# Altium PCB PCB1.PcbDoc
Units mm, origin at the board's own origin, x right, y up, seen from the top; angles counter-clockwise.
Board outline 20 x 20 mm, 2 copper layers (Top Layer, Bottom Layer), stack 1.671 mm thick; 5 components, 4 nets, 10 pads, 1 vias.
Unrouted connection lines stored in the file: 1.
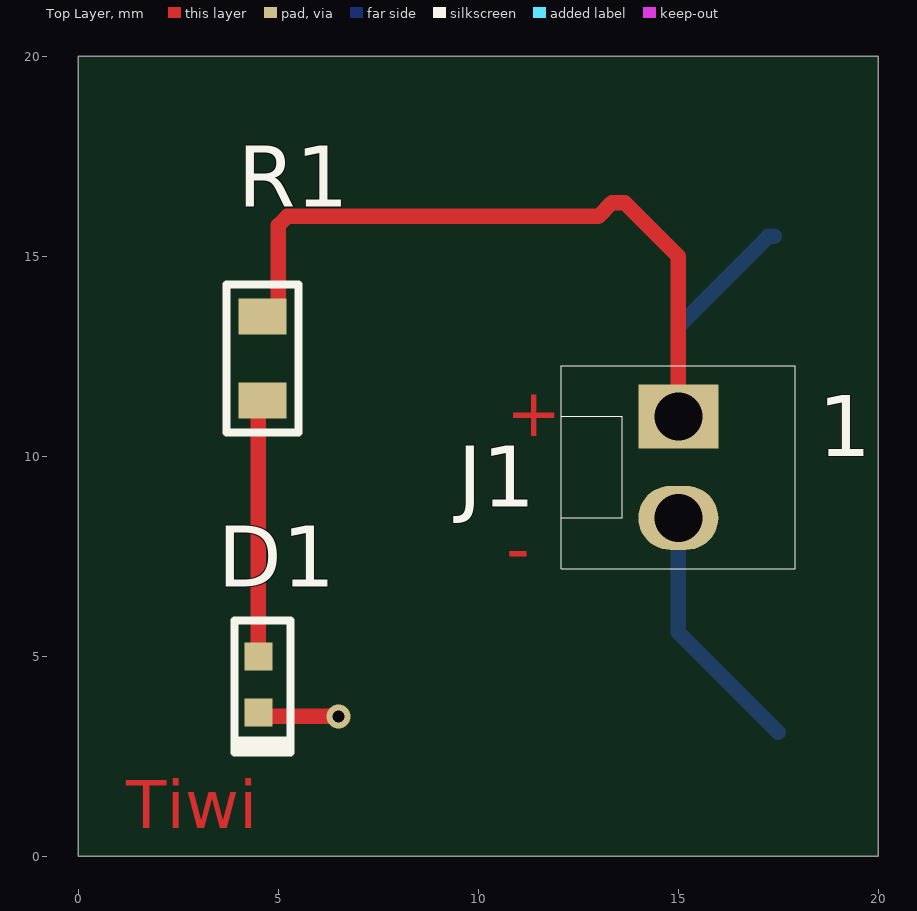
[diagram p0: Top Layer view]
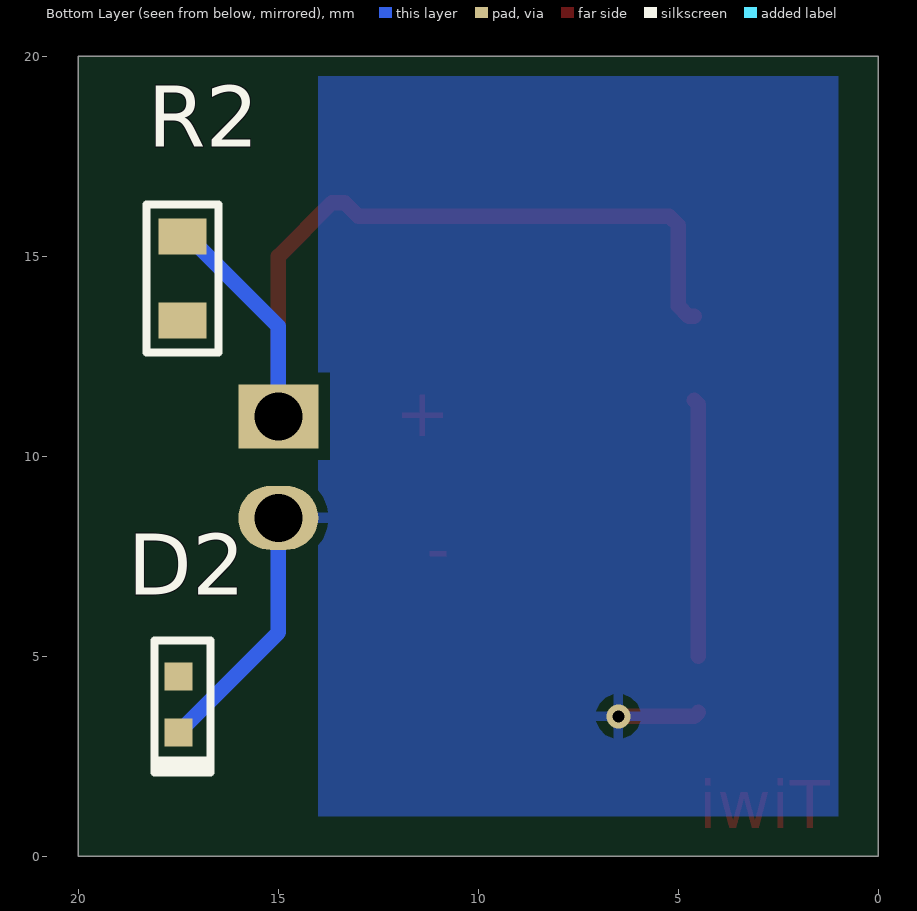
[diagram p1: Bottom Layer view, seen from below]

## Layer stack, top to bottom
Top Solder: solder mask 0.0102, Solder Resist, Dk 3.5
Top Layer: signal copper 0.0356
Dielectric 1: dielectric 1.6, FR-4, Dk 4.8
Bottom Layer: signal copper 0.0356
Bottom Solder: solder mask 0.0102, Solder Resist, Dk 3.5

## Board outline
0,0 20,0 20,20 0,20

## Design rules (kind name [scope] priority, off if disabled: settings)
Clearance [All] p1: gap=0.3 ignorepadtopadclearanceinfootprint=FALSE
PolygonConnect [All] p1: connectstyle=Relief reliefconductorwidth=0.254 reliefentries=4 polygonreliefangle="90 Angle" airgapwidth=0.254
RoutingVias [All] p1: holewidth=0.3 width=0.6 viastyle="Through Hole" minholewidth=0.3 minwidth=0.6 maxholewidth=0.3 maxwidth=0.6
SilkToSolderMaskClearance [IsPad] p1: minsilkscreentomaskgap=0.1 clearancetoexposedcopper=TRUE
SolderMaskExpansion [All] p1: expansion=0.102 istentingtop=FALSE
SupplyNets "Schematic Supply Nets_1" [InNet('GND')] p1: voltage=0.000
SupplyNets "Schematic Supply Nets" [InNet('+3V3')] p2: voltage=0.000
Width [All] p1: maxlimit=1 minlimit=0.3 preferedwidth=0.5
29 further rules are at their usual default settings.

## Components (designator, comment, footprint, x,y, rotation, side; value= is the part's Value field where it differs from the comment)
D1 "GREEn" LEd0603G 4.5,4.3 r90 top
D2 "GREEn" LEd0603G 17.5,3.8 r90 bottom
J1 "1x2Header" HDR1x2 15,11 r0 top
R1 "360R" R0805 4.5,12.5 r90 top
R2 "360R" R0805 17.5,14.5 r90 bottom

## Footprints (in the part's own frame and the unit in brackets; to place one, negate y for a bottom-side part, rotate by r counter-clockwise, add the part's x,y. Pads: shape width x height; smd on the part's side, far side on the other; paste and mask are expansions set on the pad)
HDR1x2 [mm]
  rect 2x1.6 hole 1.2: 1(0,0)
  oval 2x1.6 hole 1.2: 2(0,-2.54)
  silkscreen extent -2.92,-3.81 2.92,1.27, body extent -2.9,-3.81 2.9,1.27, height 11.71
LEd0603G [mm]
  rect 0.7x0.7 smd: 1(-0.7,0) 2(0.7,0)
  silkscreen extent -1.7,-0.8 1.6,0.6, body extent -0.8,-0.4 0.8,0.4, height 0.59
R0805 [mm]
  rect 0.9x1.2 smd: 1(-1.1,-0.1) 2(1,-0.1)
  silkscreen extent -1.9,-1 1.8,0.8, body extent -1.1,-0.72 0.9,0.53, height 0.61

## Part data
D1 D2: library part LSM0603453V, "LED GREEN CLEAR CHIP 0603 SMD", Manufacturer="Visual Communications", Supplier Part Number=LSM0603453VCT-ND, Category=LEDs, ComponentLink1Description=https://datasheet.ciiva.com:443/pdfs/VipMasterIC/IC/VISU/VISU-S-A0009188582/VISU-S-A0009188582-1.pdf?src-supplier=IHS+Markit, ComponentLink1URL=https://datasheet.ciiva.com:443/pdfs/VipMasterIC/IC/VISU/VISU-S-A0009188582/VISU-S-A0009188582-1.pdf?src-supplier=IHS+Markit, ComponentLink2Description=http://www.farnell.com/datasheets/2699708.pdf?src-supplier=Farnell, ComponentLink2URL=http://www.farnell.com/datasheets/2699708.pdf?src-supplier=Farnell, ComponentLink3Description=http://www.farnell.com/datasheets/2699708.pdf?src-supplier=Newark, ComponentLink3URL=http://www.farnell.com/datasheets/2699708.pdf?src-supplier=Newark, ComponentLink4Description=https://vcclite.com/wp-content/uploads/wpallimport/files/files/LSM0603453V.pdf?src-supplier=Digikey, ComponentLink4URL=https://vcclite.com/wp-content/uploads/wpallimport/files/files/LSM0603453V.pdf?src-supplier=Digikey, Manufacturer Part Number=LSM0603453V, Optoelectronic Device Type="SINGLE COLOR LED", Pricing="1=0.5, 10=0.291, 100=0.1218, 500=0.1086, 1000=0.1071 (USD)", Reach SVHC Compliant=Yes, RoHS=Yes, RoHS Compliant=Yes, Stock=27358, Supplier=Digikey
J1: library part "22-27-2021 (3)", "CONN HEADER VERT 2POS 2.54MMT", Contact Resistance=10mR, Flammability Rating="UL94 V-0", Insulation Color=White, Insulation Resistance=1GR, Manufacturer=Molex, Manufacturer Part Number=22-27-2021, Max Operating Temperature=75°C, Min Operating Temperature=0°C, Rated Current (Signal)=4A, Supplier Part Number=WM4111-ND, Body Breadth=0.23inch, Body Depth=0.46inch, Body Length=0.2inch, Body/Shell Style=RECEPTACLE, Category="Headers and Wire Housings", ComponentLink1Description=https://datasheet.ciiva.com:443/pdfs/VipMasterIC/IC/MOLE/MOLE-E-A0003552261/MOLE-S-A0003534498-1.pdf?src-supplier=IHS+Markit, ComponentLink1URL=https://datasheet.ciiva.com:443/pdfs/VipMasterIC/IC/MOLE/MOLE-E-A0003552261/MOLE-S-A0003534498-1.pdf?src-supplier=IHS+Markit, ComponentLink2Description=https://datasheet.ciiva.com/15217/getdatasheetpartid-163454-15217683.pdf?src-supplier=Verical, ComponentLink2URL=https://datasheet.ciiva.com/15217/getdatasheetpartid-163454-15217683.pdf?src-supplier=Verical, ComponentLink3Description=https://datasheet.ciiva.com/9468/0022272021-pcb-headers-9468403.pdf?src-supplier=Avnet, ComponentLink3URL=https://datasheet.ciiva.com/9468/0022272021-pcb-headers-9468403.pdf?src-supplier=Avnet, Connector Type="BOARD CONNECTOR", Contact Finish - Mating="NOT SPECIFIED", Contact Finish - Termination="Bright Tin (Sn)", Contact Gender=Male, Contact Material=Brass, Contact Pattern=RECTANGULAR, Contact Style="SQ PIN-SKT", DIN Conformance=No, Durability=25Cycles, Filter Feature=No, IEC Conformance=No, Insulation Material=Nylon, JESD-609 Code=e3, Mating Contact Pitch=0.1inch, Mating Information="MULTIPLE MATING PARTS AVAILABLE", MIL Conformance=No, Mixed Contacts=No, Mounting Option 1=LOCKING, Mounting Style=STRAIGHT, Mounting Technology=Board, Number Of Connectors=1, Number of Contacts=2, Number Of PCB Rows=1, Number of Rows Loaded=1, Option="General Purpose", PCB Contact Pattern=RECTANGULAR, Plating Thickness=100uin, Polarization Key="POLARIZED HOUSING", Pricing="1=0.24, 10=0.208, 100=0.1766, 500=0.15764, 2850=0.1394, 5700=0.13275, 11400=0.12641 (USD)", Reach SVHC Compliant=Yes, Reference Standard=UL, Reliability=COMMERCIAL, RoHS=Yes, RoHS Compliant=Yes, Stock=49685, Supplier=Digikey, Terminal Length=0.14inch, Terminal Pitch=2.54mm, Termination=Solder
R1 R2: library part AC0805FR-07360RL, "RES SMD 360 OHM 1% 1/8W 0805", Case/Package=0805, Manufacturer=Yageo, Max Operating Temperature=155°C, Min Operating Temperature=-55°C, Package Height=0.5mm, Package Length=2mm, Package Shape=Rectangular, Package Width=1.25mm, Power=125mW, Rated Temperature=70°C, Resistor Type="FIXED RESISTOR", Supplier Part Number=6185724, Temperature Coefficient (ppm/Cel)=100, Tolerance=1%, Working Voltage=150V, Additional Feature="LASER TRIMMABLE", Category="Chip SMD Resistors", ComponentLink1Description=https://datasheet.ciiva.com:443/pdfs/VipMasterIC/IC/YAGO/YAGO-S-A0003597364/YAGO-S-A0003597364-1.pdf?src-supplier=IHS+Markit, ComponentLink1URL=https://datasheet.ciiva.com:443/pdfs/VipMasterIC/IC/YAGO/YAGO-S-A0003597364/YAGO-S-A0003597364-1.pdf?src-supplier=IHS+Markit, ComponentLink2Description=http://www.yageo.com/NewPortal/yageodocoutput?fileName=/pdf/R-Chip/PYu-AC_51_RoHS_L_6.pdf&src-supplier=Digikey, ComponentLink2URL=http://www.yageo.com/NewPortal/yageodocoutput?fileName=/pdf/R-Chip/PYu-AC_51_RoHS_L_6.pdf&src-supplier=Digikey, ComponentLink3Description=https://datasheet.octopart.com/AC0805FR-07360RL-Yageo-datasheet-178509465.pdf?src-supplier=Newark, ComponentLink3URL=https://datasheet.octopart.com/AC0805FR-07360RL-Yageo-datasheet-178509465.pdf?src-supplier=Newark, Construction=Chip, JESD-609 Code=e3, Manufacturer Part Number=AC0805FR-07360RL, Mounting Technology="Surface Mount", Packaging="Tape and Reel", Pins=2, Pricing="5000=0.0029, 20000=0.0028, 75000=0.0027, 150000=0.0026, 375000=0.0025 (USD)", Reach SVHC Compliant=Yes, Reference Standard=AEC-Q200, RoHS=Yes, RoHS Compliant=Yes, Stock=5000, Supplier="Future Electronics", Technology="METAL GLAZE/THICK FILM", Terminal Finish=Nickel, Termination=Wraparound

## Via types
v1: diameter 0.6, hole 0.3, Top Layer to Bottom Layer, tented both sides, 1 vias

## Nets (pads, with @x,y where several pads share a name; then routed paths per layer and width w, separated by ;. In a path a pad name is that pad's centre, name@x,y a point inside that pad or via, vN(x,y) a via of type N, cw(c..) or ccw(c..) an arc to the next point about the centre after c; other vN are vias at no path point)
+3V3: J1.1 R1.2 R2.2 | length 22.9
  Top Layer w0.381: R1.2 4.74,13.5 5,13.76 5,15.777 5.223,16 13,16 13.342,16.342 13.658,16.342 15,15 J1.1
  Bottom Layer w0.381: J1.1 15,13.25 17.25,15.5 R2.2
DIODE1: D1.2 R1.1 | length 6.4
  Top Layer w0.381: D1.2 4.5,11.3 R1.1
DIODE2: D2.2 R2.1
GND: D1.1 D2.1 J1.2 | length 8.5
  Top Layer w0.381: D1.1 4.6,3.5 v1(6.5,3.5)
  Bottom Layer w0.381: J1.2 14.873,8.333 15,8.206 15,5.6 D2.1

## Polygon pours and split planes (outlines as drawn)
GND on Bottom Layer "GND_L02_P000" (solid, pour order 0): 1,1 14,1 14,19.5 1,19.5

## Other copper
Top Layer:
  text "+" at 10.7,10.5 h1.2
  text "-" at 10.7,7.1 h1.2
  text "Tiwi" at 1.2,0.7 h1.2

## Text inside footprints (layer, text, board x,y; h text height)
J1: Top Assembly "1" at 18,10 h1.52; Top Overlay "1" at 18.5,10 h1.52